# Altium PCB CoinSensor _TLV333 v1.0.PcbDoc
Units mm, origin at the board's own origin, x right, y up, seen from the top; angles counter-clockwise.
Board outline 20 x 20 mm, 2 copper layers (Top Layer, Bottom Layer), stack 0.971 mm thick; 30 components, 12 nets, 60 pads, 27 vias.
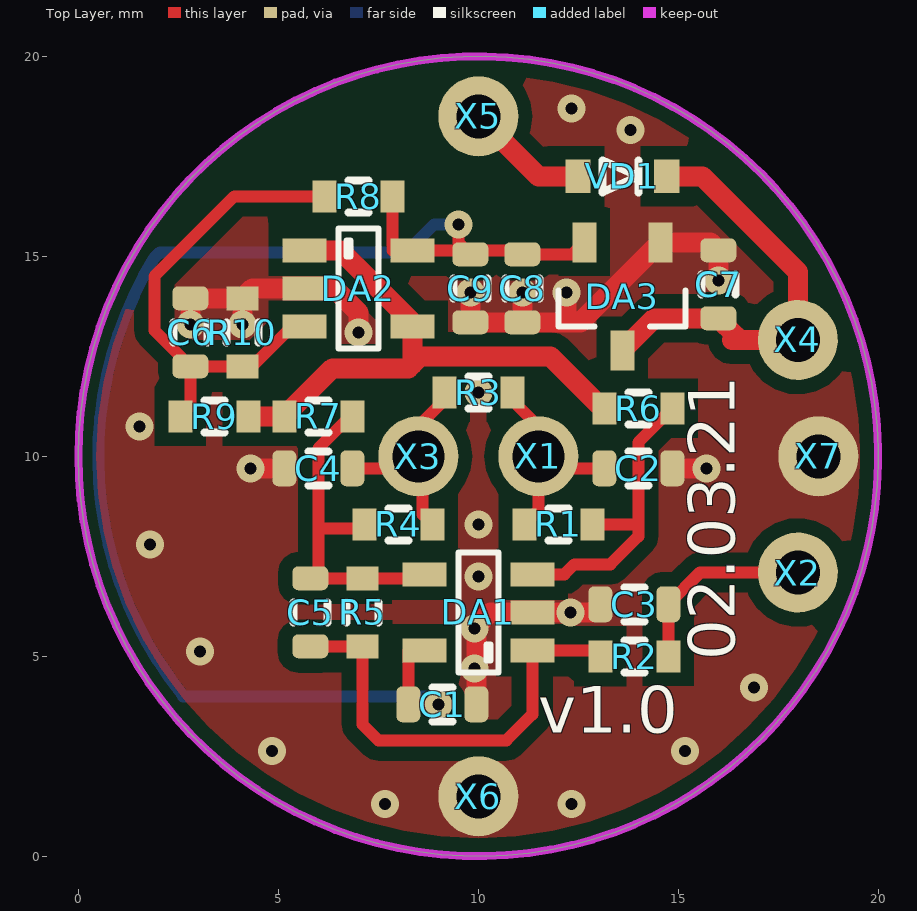
[diagram p0: Top Layer view]
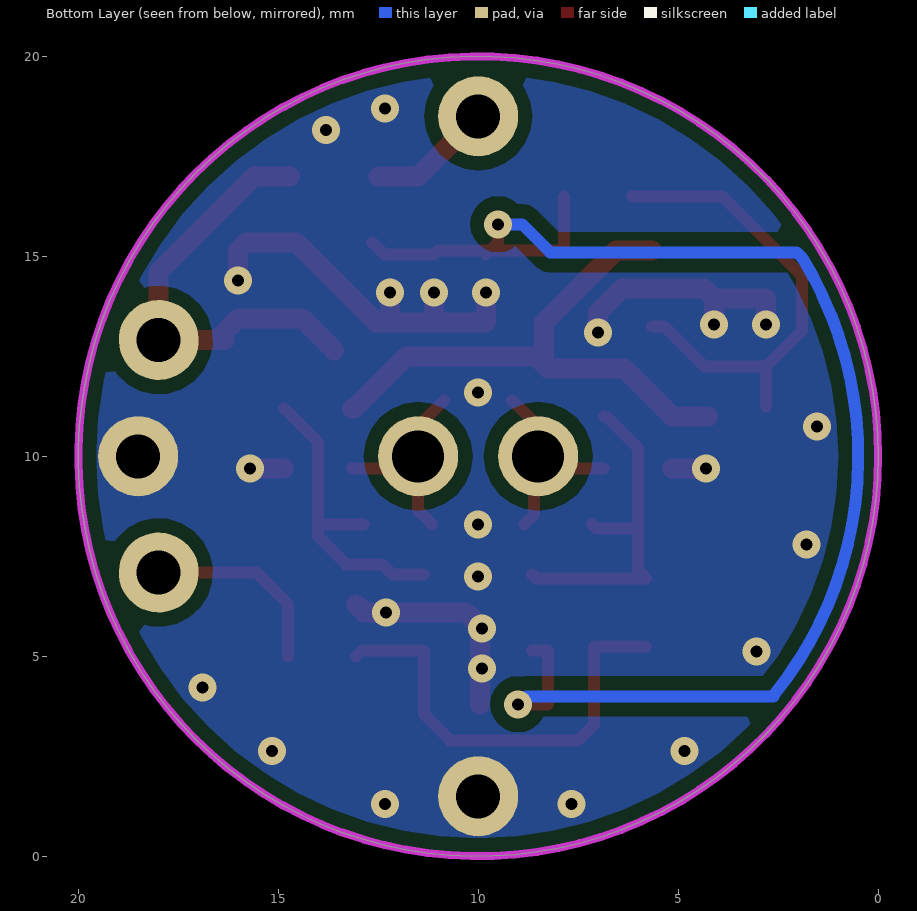
[diagram p1: Bottom Layer view, seen from below]

## Layer stack, top to bottom
Top Solder: solder mask 0.0102, Solder Resist, Dk 3.5
Top Layer: signal copper 0.0356
Dielectric 1: dielectric 0.9, FR-4, Dk 4.8
Bottom Layer: signal copper 0.0356
Bottom Solder: solder mask 0.0102, Solder Resist, Dk 3.5

## Board outline
19.998,9.8 cw(c10,10) 19.998,10.2

## Design rules (kind name [scope] priority, off if disabled: settings)
Clearance [All] p1: gap=0.2 except(0.35: Arc-Poly Track-Poly SMDPad-Poly THPad-Poly Via-Poly Fill-Poly Poly-Poly)
ComponentClearance "Clearance JMP" [(HasFootprint('Jumper NO RF'))] p1: gap=-1 collisioncheckmode=3 verticalgap=-0.5 showdistances=FALSE
ComponentClearance "Clearance TEST" [(HasFootprint('test point 1mm'))] p2: gap=-0.5 collisioncheckmode=3 verticalgap=-0.5 showdistances=FALSE
ComponentClearance "Clearance REG-JUMPER" [HasFootprint('SOT-23-5') vs (HasFootprint('RES 0603'))] p3: gap=-1.5 collisioncheckmode=3 verticalgap=-0.5 showdistances=FALSE
ComponentClearance "Clearance PLS" [HasFootprint('PLS-1')] p4: gap=0 collisioncheckmode=3 verticalgap=0 showdistances=FALSE
ComponentClearance [All] p5: gap=0.254 collisioncheckmode=3 verticalgap=0.254 showdistances=FALSE
Height [All] p1: minheight=0 maxheight=55 prefheight=12.7
HoleSize [All] p1: absolutevalues=TRUE maxlimit=3.5 minlimit=0.025 maxpercent=80.000 minpercent=20.000
MinimumSolderMaskSliver [All] p1: minsoldermaskwidth=0.01
PolygonConnect "Polygon to TEST PAD" [(HasFootprint('test point 1mm'))] p1: connectstyle=Direct reliefconductorwidth=0.254 reliefentries=4 polygonreliefangle="90 Angle" airgapwidth=0.254
PolygonConnect "Polygon to Battery" [HasFootprint('KEYS1042')] p2: connectstyle=Relief reliefconductorwidth=1 reliefentries=4 polygonreliefangle="90 Angle" airgapwidth=0.5
PolygonConnect "Polygon to VIA" [IsVia] p3: connectstyle=Direct reliefconductorwidth=0.254 reliefentries=4 polygonreliefangle="90 Angle" airgapwidth=0.254
PolygonConnect [All] p4: connectstyle=Direct reliefconductorwidth=0.3 reliefentries=4 polygonreliefangle="90 Angle" airgapwidth=0.4
RoutingVias [All] p1: holewidth=0.3 width=0.7 viastyle="Through Hole" minholewidth=0.3 minwidth=0.7 maxholewidth=1 maxwidth=2
SilkToSilkClearance [All] p1: silktosilkclearance=0.01
SilkToSolderMaskClearance [IsPad] p1: minsilkscreentomaskgap=0.01 clearancetoexposedcopper=TRUE
SolderMaskExpansion "SolderMask for VIA" [IsVia] p1: expansion=-0.5
SolderMaskExpansion [All] p2: expansion=0.102
ViasUnderSMD [All] p1: allowed=TRUE
Width [All] p1: maxlimit=1 minlimit=0.2 preferedwidth=0.2
24 further rules are at their usual default settings.

## Components (designator, comment, footprint, x,y, rotation, side; value= is the part's Value field where it differs from the comment)
C1 "100n" "CAP 0603" 9.1,3.8 r180 top
C2 "1n" "CAP 0603" 14,9.7 r0 top
C3 "100n" "CAP 0603" 13.9,6.3 r180 top
C4 "1n" "CAP 0603" 6,9.7 r0 top
C5 "1n" "CAP 0603" 5.8,6.1 r270 top
C6 "100n" "CAP 0603" 2.8,13.1 r270 top
C7 "10u" "CAP 0603" 16,14.3 r270 top
C8 "100n" "CAP 0603" 11.1,14.2 r90 top
C9 "10u" "CAP 0603" 9.8,14.2 r90 top
DA1 "TLV333IDBVR" SOT-23-5 10,6.1 r180 top
DA2 "TLV333IDBVR" SOT-23-5 7,14.2 r0 top
DA3 "MCP1703" SOT-23A 13.6,14 r270 top
R1 "10k" "RES 0603" 12,8.3 r180 top
R2 "100" "RES 0603" 13.9,5 r180 top
R3 "1k" "RES 0603" 10,11.6 r180 top
R4 "10k" "RES 0603" 8,8.3 r0 top
R5 "1M" "RES 0603" 7.1,6.1 r270 top
R6 "1M" "RES 0603" 14,11.2 r0 top
R7 "10k" "RES 0603" 6,11 r0 top
R8 "100k" "RES 0603" 7,16.5 r180 top
R9 "0" "RES 0603" 3.4,11 r0 top
R10 "100k" "RES 0603" 4.1,13.1 r90 top
VD1 "diod" SOD-323 13.6,17 r180 top
X1 "INPUT" PLS-1#1 11.5,10 r0 top
X2 "+VOUT" PLS-1#2 17.987,7.093 r340 top
X3 "INPUT" PLS-1#1 8.5,10 r0 top
X4 "+VIN" PLS-1#2 17.987,12.907 r200 top
X5 "+BATT" PLS-1#2 10,18.5 r90 top
X6 "-BATT" PLS-1#2 10,1.5 r90 top
X7 "GND" PLS-1#2 18.5,10 r0 top

## Footprints (in the part's own frame and the unit in brackets; to place one, negate y for a bottom-side part, rotate by r counter-clockwise, add the part's x,y. Pads: shape width x height; smd on the part's side, far side on the other; paste and mask are expansions set on the pad)
"CAP 0603" [mm]
  rrect50% 0.6x0.9 smd mask+0.05: 1(-0.85,0) 2(0.85,0)
  silkscreen extent -0.25,-0.43 0.25,0.43, body extent -0.8,-0.4 0.8,0.4, height 0.8
PLS-1#1 [mm]
  round 2 hole 1.3: 1(0,0)
PLS-1#2 [mm]
  round 2 hole 1.1: 1(0,0)
"RES 0603" [mm]
  rect 0.6x0.8 smd mask+0.05: 1(-0.85,0) 2(0.85,0)
  silkscreen extent -0.25,-0.4 0.25,0.4, body extent -0.77,-0.42 0.78,0.43, height 0.45
SOD-323 [mm]
  rect 0.63x0.83 smd: 1(-1.11,0) 2(1.11,0)
  silkscreen extent -0.4,-0.4 0.5,0.4, body extent -1.25,-0.62 1.25,0.63, height 1
SOT-23-5 [mm]
  rect 1.1x0.6 smd: 1(-1.35,0.95) 2(-1.35,0) 3(-1.35,-0.95) 4(1.35,-0.95) 5(1.35,0.95)
  silkscreen extent -0.5,-1.5 0.5,1.5, body extent -1.4,-1.45 1.4,1.45, height 1.45
SOT-23A [mm]
  rect 1x0.6 smd: 1(-1.35,0.95) 2(-1.35,-0.95) 3(1.35,0)
  silkscreen extent -0.14,-1.59 0.75,1.59, body extent -1.25,-1.46 1.23,1.46, height 1.02

## Part data
C1 C2 C3 C4 C5 C6 C7 C8 C9: library part "Cap 0603", "Ceramic capacitor, SMD"
DA1 DA2: "Operation Amplifier, rail-to-rail"
DA3: "Voltage regulator, linear"
R1 R2 R3 R4 R5 R6 R7 R8 R9 R10: library part "Res 0603", "Chip resistor, SMD"
VD1: library part RB751V40T1G, "Diode schottky"
X1 X2 X3 X4 X5 X6 X7: library part "IN-OUT pin"

## Via types
v1: diameter 0.7, hole 0.3, Top Layer to Bottom Layer, 27 vias

## Nets (pads, with @x,y where several pads share a name; then routed paths per layer and width w, separated by ;. In a path a pad name is that pad's centre, name@x,y a point inside that pad or via, vN(x,y) a via of type N, cw(c..) or ccw(c..) an arc to the next point about the centre after c; other vN are vias at no path point)
+3V3: C1.2 C8.2 C9.2 DA1.5 DA2.5 DA3.2 R8.1 | length 35.8
  Top Layer w0.3: R8.1 7.85,15.15 DA2.5 C9.2@9.7,15.15 ; DA1.5 8.25,5.15 C1.2 v1(9,3.8) ; v1(9.5,15.8) 9.5,15.35 C9.2@9.7,15.15 ; C9.2 C9.2@9.7,15.15 ; DA3.2 12.35,15.05 C8.2 11,15.15 C9.2@9.7,15.15
  Bottom Layer w0.3: 2.621,4 8.8,4 v1(9,3.8) ; 2.621,4.017 cw(c10,10) 1.889,14.946 2.043,15.1 8.2,15.1 8.9,15.8 v1(9.5,15.8)
+VIN: C7.2 DA3.3 VD1.1 X4.1 | length 11
  Top Layer w0.5: DA3.3 14.4,13.45 C7.2 16.443,13.007 ; VD1.1 15.6,17 17.987,14.613 X4.1 16.343,12.907
GND: C1.1 C2.2 C3.2 C4.1 C6.1 C7.1 C8.1 C9.1 DA1.2 DA2.2 DA3.1 R10.2 X6.1 X7.1 | length 23.7
  Top Layer w0.5: v1(2.8,13.3) 2.8,13.2 C6.1 R10.2 ; v1(4.1,13.3) R10.2 ; v1(4.3,9.7) C4.1 ; v1(7,13.1) 7,13.6 6.4,14.2 DA2.2 4.35,14.2 R10.2 ; v1(9.8,14.1) C9.1 C8.1 ; C1.1 9.95,5.75 10.3,6.1 DA1.2 12.85,6.1 C3.2 ; v1(11.1,14.1) C8.1 ; v1@12.2,14.2 v1(12.2,14.1) 12.2,13.35 ; C2.2 v1(15.7,9.7) ; v1(16,14.4) C7.1 15.8,15.35 DA3.1 12.55,13.35 12.2,13.35 ; C8.1 12.2,13.35
  other v1: 7.671,1.307 12.329,1.307 4.838,2.628 15.162,2.628 16.894,4.215 9.9,4.7 3.037,5.125 9.9,5.7 12.3,6.1 10,7 1.79,7.8 10,8.3 1.532,10.741 10,11.6 13.804,18.157 12.329,18.693
NetC2_1: C2.1 R1.2 R3.1 X1.1 | length 5.7
  Top Layer w0.3: R3.1@10.85,11.4 12,10.25 12,10 X1.1@11.75,9.75 ; R1.2 11.5,8.65 11.5,9.5 X1.1@11.75,9.75 ; X1.1 X1.1@11.75,9.75 ; C2.1 11.8,9.7 X1.1@11.75,9.75
NetC3_1: C3.1 R2.1 X2.1 | length 4.9
  Top Layer w0.3: R2.1 C3.1 15.543,7.093 X2.1
NetC4_2: C4.2 R3.2 R4.2 X3.1 | length 4.7
  Top Layer w0.3: C4.2 8.2,9.7 8.25,9.75 8.6,9.4 8.6,8.55 R4.2 ; X3.1@8,10.25 R3.2@9.15,11.4
NetC5_1: C5.1 DA1.4 R4.1 R5.1 R7.2 | length 8.6
  Top Layer w0.3: R7.2 6.8,11 6,10.2 6,8.2 ; R4.1 7.05,8.2 6,8.2 ; DA1.4 8.55,6.95 R5.1 C5.1 6,7.15 6,8.2
NetC5_2: C5.2 DA1.1 R2.2 R5.2 | length 11.3
  Top Layer w0.3: C5.2 R5.2 7.1,3.3 7.5,2.9 10.7,2.9 11.35,3.55 DA1.1 12.9,5.15 R2.2
NetC6_2: C6.2 DA2.3 R8.2 R9.1 R10.1 | length 12
  Top Layer w0.3: R9.1@2.8,11.25 C6.2 ; DA2.3 5.35,13.25 4.35,12.25 R10.1 C6.2 ; R8.2 3.9,16.5 1.9,14.5 1.9,13.15 C6.2
NetDA1_3: DA1.3 R1.1 R6.2 | length 7.6
  Top Layer w0.3: DA1.3 12.15,7.05 12.4,7.3 13.3,7.3 14,8 14,10.35 R6.2 ; R1.1 13.9,8.3
NetDA2_1: DA2.1 DA2.4 R6.1 R7.1 R9.2 | length 14.6
  Top Layer w0.5: R9.2 R7.1 6.35,12.2 8.25,12.2 8.55,12.5 11.8,12.5 13.1,11.2 R6.1 ; DA2.1 6.55,15.15 8.35,13.35 DA2.4 8.35,12.3
NetVD1_2: VD1.2 X5.1 | length 3.1
  Top Layer w0.5: X5.1 11.5,17 VD1.2

## Polygon pours and split planes (outlines as drawn)
GND on Top Layer "Top Layer-No Net" (solid, remove dead copper, pour order 1): 19.998,9.8 cw(c10,10) 19.998,10.2
GND on Bottom Layer "Top Layer-No Net" (solid, remove dead copper, pour order 0): 19.998,9.8 cw(c10,10) 19.998,10.2

## Keep-outs
Keep-Out Layer:
  the board outline again, w0.2

## Silkscreen, mask and mechanical layers (free items; w line width, h text height)
Top Overlay:
  text "02.03.21" at 16.8,4.9 h2 r90
  text "v1.0" at 11.5,2.7 h2
Board:
  the board outline again, w0.2
Top assembly:
  lines w0.4: 7.7,10 9.3,10 ; 10.7,10 12.3,10 ; 11.5,9.2 11.5,10.8